# Altium PCB CAN_Test_Runner.PcbDoc (part 2 of 2)
Units mil, origin at the board's own origin, x right, y up, seen from the top; angles counter-clockwise.
Board outline 3937.01 x 2598.43 mil, 4 copper layers (Top Layer, Mid-Layer 1, Mid-Layer 2, Bottom Layer); 131 components, 89 nets, 516 pads, 356 vias.
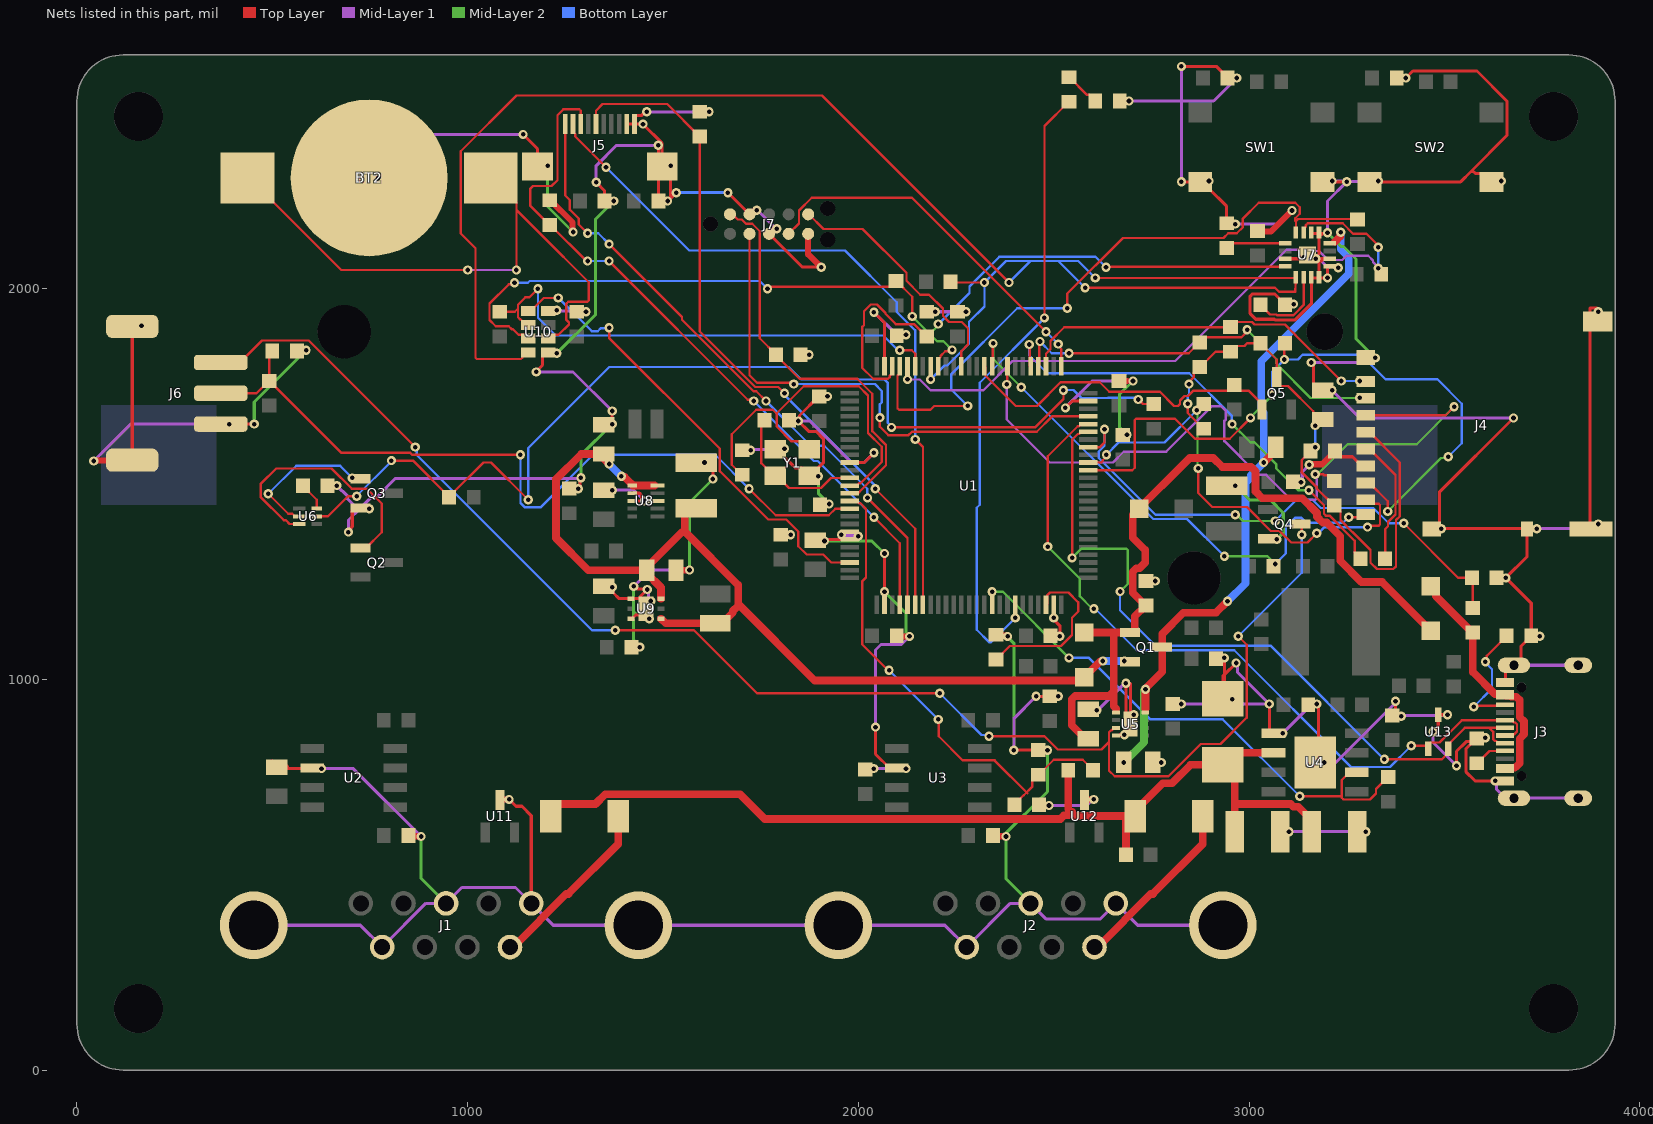
[diagram p4: the nets of this part, all layers, seen from the top]

## Via types
v1: diameter 23.62, hole 11.81, Top Layer to Bottom Layer, 356 vias

## Nets (pads, with @x,y where several pads share a name; then routed paths per layer and width w, separated by ;. In a path a pad name is that pad's centre, name@x,y a point inside that pad or via, vN(x,y) a via of type N, cw(c..) or ccw(c..) an arc to the next point about the centre after c; other vN are vias at no path point) (continued)
GND: BT2.2 C1.2 C2.2 C6.2 C7.2 C8.2 C9.2 C10.2 C12.2 C13.2 C14.2 C15.2 C16.2 C17.2 C18.2 C19.2 C20.2 C21.2 C22.2 C23.2 C24.2 C25.2 C26.2 C27.2 C28.2 C29.2 C30.2 C31.2 C32.2 C33.2 C34.2 C35.2 C36.2 C37.2 C38.2 C39.2 C40.2 C41.2 C42.2 C43.2 D3.2 D7.2 J1.3 J1.5 J1.6 J1.MH J2.3 J2.5 J2.6 J2.MH J3.A1 J3.A12 J3.SH J4.6 J4.10 J4.SH J5.9 J5.10 J5.MP J6.3 J6.MP J7.3 J7.5 J7.9 Q3.2 Q4.2 R2.2 R3.2 R5.2 R9.2 R10.2 R11.2 R14.2 R15.2 R18.2 R19.2 R21.2 R24.2 R25.2 R26.2 R27.2 R29.2 R40.2 R41.2 SW1.2 SW1.4 SW2.2 SW2.4 U1.10 U1.19 U1.20 U1.27 U1.49 U1.74 U1.99 U2.2 U3.2 U4.1 U4.9 U5.4 U5.9 U7.3 U7.7 U7.8 U7.9 U7.10 U7.13 U7.14 U7.17 U8.2 U8.3 U8.8 U9.1 U9.3 U9.7 U10.5 U10.8 U11.3 U12.3 U13.3 Y1.2 Y1.4 | length 25816.9
  Top Layer w7.87: J6.MP@104,1561.02 116.97,1561.02 141.73,1585.79 141.73,1881.89 v1(165.35,1905.51) ; v1(389.76,1653.54) v1(454,1653.54) ; C18.2@500,791.34 508.39,782.95 527.05,782.95 538,772 601.33,772 U2.2@602.36,773.03 ; v1(695,1377) 695,1381.26 704.72,1390.99 704.72,1431.1 712.6,1438.98 Q3.2@726.38,1438.98 ; C35.2@848.43,600.39 850.82,598 v1(881,598) ; v1(1106.3,692.91) 1123.9,675.31 1139.11,675.31 1162.99,651.43 J1.5@1162.99,426.77 ; v1(1142,2395) 1179.13,2357.87 J5.MP@1179.13,2312.99 ; v1(1176,1787) 1176,1788.55 1191.93,1804.48 1191.93,1827.76 1198.82,1834.65 1201,1834.65 1202.97,1836.61 U10.5@1206.69,1836.61 ; v1@1280,1488.19 1280,1488.99 1287.48,1496.47 1287.48,1513.48 v1(1290,1516) ; v1(1329,2272.39) 1350.39,2251 C36.2@1350.39,2224.41 ; C16.2@1348.43,1651.57 1355.43,1658.57 1370,1658.57 v1(1370,1687) ; v1(1370.08,1236.22) 1372.05,1234.25 1372.05,1222.44 1387.8,1206.69 U9.1@1418.31,1206.69 1436.69,1206.69 1439.8,1209.8 U9.7@1442,1212 ; J5.9@1407.48,2421.26 J5.10@1427.17,2421.26 ; U9.3@1418.31,1155.51 1420.28,1157.48 1423.23,1157.48 1431.03,1165.29 1440.94,1165.29 1445.3,1169.64 U9.7@1445.3,1169.7 ; U8.3@1421.26,1456.69 1444.88,1456.69 1444.88,1471.77 1440.27,1476.38 U8.2@1421.26,1476.38 ; v1(1425,1238) 1429.26,1238 1435.52,1231.74 1458.26,1231.74 v1(1460,1230) U9.7@1442,1212 ; v1(1452.76,1456.69) U8.8@1478.35,1456.69 ; v1(1458.66,2452.76) 1454.4,2452.76 1444.56,2442.91 1429.13,2442.91 1427.17,2440.95 J5.10@1427.17,2421.26 ; v1(1465,1155) U9.7@1456.69,1163.31 ; C38.2@1488.19,2224.41 v1(1488.19,2367) ; J5.MP@1498.03,2312.99 1498.03,2372.05 v1(1448.82,2421.26) J5.10@1427.17,2421.26 ; v1(1511.81,2224.41) 1519.69,2232.28 v1(1519.69,2314.96) ; v1@1520.13,2231.84 v1(1534,2245.7) ; v1@1559.06,1279.53 1567.53,1279.53 v1(1568,1280) ; C10.2@1585.63,1555.12 1607.2,1555.12 1627.87,1534.45 v1(1627.87,1512.87) ; v1(1666.31,2245.7) J7.9@1721.65,2190.35 ; J7.3@1771.65,2140.35 1857.01,2055 v1(1905,2055) ; Y1.4@1797,1588.58 1797,1582.92 1838.58,1541.34 1854.33,1541.34 Y1.2@1874.02,1521.65 ; v1(1846.46,1661.42) 1873.11,1634.76 1891.65,1634.76 1910.51,1615.91 1910.51,1554.21 1897.64,1541.34 Y1.2@1897.64,1521.65 ; v1@1846.46,1663.39 1849.49,1666.42 1849.49,1675.28 1898.62,1724.41 C28.2@1899.61,1724.41 ; v1(1913.39,1354.33) 1913.39,1358.27 U1.20@1978.35,1358.27 1980.31,1360.24 1995.62,1360.24 1995.62,1361.76 v1(2000,1366.14) ; v1(1956.69,1370.08) 1961.07,1374.46 1961.07,1375.98 1976.38,1375.98 U1.19@1978.35,1377.95 ; U1.10@1978.35,1555.12 2015.12,1555.12 v1(2040,1580) ; v1(2040,1940) 2066.93,1913.07 U1.99@2066.93,1801.18 ; v1(2044,878) 2044,808.76 2079.73,773.03 U3.2@2098.43,773.03 ; U1.27@2066.93,1190.94 v1(2066.93,1322.13) ; v1@2122.05,1110 v1(2131,1110) ; v1@2370.08,598 v1(2378,598) ; v1(2398,818.9) R9.2@2460.63,818.9 ; v1(2455,956.69) R10.2@2490.16,956.69 ; U1.49@2500,1190.94 2500,1153.22 2515.75,1137.47 v1(2515.75,1110.24) ; v1(2530.02,1694.98) 2547.63,1712.6 U1.74@2588.58,1712.6 ; U5.4@2659.45,856.3 2670,856.3 2676.53,862.84 2678.39,862.84 U5.9@2681.1,865.54 ; v1@2670,858.27 v1(2681.1,858.27) 2681.1,871.3 2683.07,871.3 2685,873.23 U5.9@2685,889.72 ; U5.9@2681.1,867.4 2683.07,867.4 2685,869.33 U5.9@2685,889.72 ; v1(2685,990) U5.9@2685,889.72 ; 2688.98,1763.78 v1(2703,1763.78) ; U5.9@2696.85,885.83 U5.9@2696.85,901.57 ; 2696.85,990 U5.9@2696.85,901.57 ; v1(2704.72,909.45) U5.9@2696.85,901.57 ; v1(2827,2273.62) SW1.2@2875,2273.62 ; v1(2827,2569) 2916.24,2569 2944.88,2540.35 C41.2@2944.88,2539.37 ; v1(2897.64,2275.59) 2897.64,2255.91 2942.91,2210.63 R21.2@2942.91,2167.32 ; D3.2@2933.07,950.79 2933.07,1008.07 2937.01,1012.01 ; v1(2937.01,1055.12) 2937.01,1012.01 ; v1(2956.69,948.82) 2937.01,968.5 2937.01,1012.01 ; v1(2967,1042) 2937.01,1012.01 ; v1(3052,937.01) 3052,870.28 3059.87,862.4 U4.1@3062.99,862.4 ; U7.3@3092.52,2076.77 3092.6,2076.69 3131.89,2076.69 U7.17@3137.87,2082.68 ; v1(3114.17,1960.63) 3103.84,1970.97 3081.2,1970.97 3065.87,1986.3 3008.11,1986.3 3002.87,1981.06 3002.87,1936.26 3017.24,1921.89 3064.81,1921.89 3066.58,1920.12 3118.46,1920.12 3159.45,1961.11 U7.7@3159.45,2029.53 3161.42,2027.56 3177.17,2027.56 U7.8@3179.13,2029.53 v1@3179.13,2076.77 ; v1(3159,1811) 3159,1806.74 3165.35,1800.38 3165.35,1755.91 3181.1,1740.16 C32.2@3188.98,1740.16 ; U7.14@3159.45,2143.7 3161.42,2141.73 3177.17,2141.73 U7.13@3179.13,2143.7 ; v1@3174.17,2083.89 3179.13,2088.85 3179.13,2132.13 3188.73,2141.73 ; v1@3180,935.04 3178.23,933.27 3178.23,802.09 v1(3192.91,787.4) ; U7.8@3181.1,2027.56 v1(3200.79,2027.56) 3200.79,2055.12 3202.76,2057.09 U7.9@3206.69,2057.09 3208.29,2055.49 3226.75,2055.49 v1(3228.35,2053.9) ; U7.13@3181.1,2141.73 3188.73,2141.73 ; 3183.07,2076.77 U7.10@3206.69,2076.77 3204.72,2074.8 3188.98,2074.8 3185.04,2070.87 ; v1(3201,2143) 3199.73,2141.73 3188.73,2141.73 ; SW1.4@3212.6,2273.62 v1(3250,2273.62) ; C33.2@3220.47,1583.66 3234.25,1569.88 3264.76,1569.88 3288.39,1546.26 J4.6@3298.23,1546.26 ; SW2.2@3330.71,2273.62 3541.62,2273.62 3568,2300 ; R5.2@3366.14,907.48 3375,916.34 v1(3375,944) ; v1(3401.57,2539.37) 3419.37,2557.17 3583.43,2557.17 3660.51,2480.08 3660.51,2392.51 3568,2300 ; J4.SH@3468.5,1385.83 3472.44,1385.83 3487.21,1400.59 3487.21,1479.21 v1(3677,1669) ; v1(3471,866) 3484.25,879.25 U13.3@3484.25,909.45 v1(3507.87,909.45) ; v1(3492.13,1385.83) 3710.63,1385.83 J4.10@3711.61,1384.84 ; v1(3531,779) 3531,815.94 3555.86,840.8 3575.05,840.8 R26.2@3582.68,848.43 ; R26.2@3578.43,848.43 3578.43,845.16 3555.04,821.77 3555.04,764.02 3578.9,740.16 v1(3629.92,740.16) ; v1(3645.67,2275.59) 3625.98,2295.28 3579.25,2295.28 3574.52,2300 3568,2300 ; J3.A12@3666,1000 3656.42,1000 3656.42,1021.67 3670.97,1036.22 3681.12,1036.22 3695.67,1050.77 3695.67,1084.45 3721.46,1110.24 R27.2@3724.41,1110.24 ; J4.10@3711.61,1381 3711.61,1313.98 v1(3657.48,1259.84) 3722.44,1194.88 R27.2@3722.44,1112.2 ; J4.SH@3875,1384.84 3872.95,1386.89 3872.95,1950.87 3890.69,1950.87 3890.69,1943.96 v1(3893.7,1940.94) ; U9.7@1442,1212 1442,1173 U9.7@1445.3,1169.7 ; U9.7@1445.3,1169.7 1447.8,1172.2 U9.7@1456.69,1181.1 U9.7@1456.69,1163.31 ; U9.7@1445.3,1169.7 1450.3,1169.7 U9.7@1456.69,1163.31 ; U5.9@2685,889.72 U5.9@2696.85,901.57
  Top Layer w15.75: v1(43.31,1559.06) 44.29,1560.04 103.02,1560.04 104,1559.06 105.97,1561.02 J6.MP@141.73,1561.02 ; J6.MP@141.73,1903.54 143.7,1905.51 v1(165.35,1905.51) ; J6.3@368.11,1653.54 v1(389.76,1653.54) ; C18.2@511.81,775.59 C18.2@535.43,775.59 ; C43.2@562.99,1840.55 563.98,1841.54 585.63,1841.54 v1(586.61,1842.52) ; U2.2@602.36,773.03 624.61,773.03 v1(625.98,771.65) ; R18.2@641.73,1496.06 v1(665.35,1496.06) ; Q3.2@726.38,1438.98 727.36,1437.99 747.05,1437.99 v1(748.03,1437.01) ; BT2.2@748.03,2283.46 v1(771.65,2283.46) ; C35.2@848.43,600.39 850.39,598.43 v1@874.02,598.43 ; U11.3@1082.68,690.94 1084.65,692.91 v1(1106.3,692.91) ; J5.MP@1179.13,2312.99 1181.1,2314.96 v1(1204.72,2314.96) ; U10.5@1206.69,1836.61 1207.68,1835.63 1227.36,1835.63 v1(1228.35,1834.65) ; U10.8@1206.69,1942.91 1207.68,1943.9 1227.36,1943.9 v1(1228.35,1944.88) ; R40.2@1210.63,2226.38 1211.61,2226.38 1268.49,2169.5 1268.49,2146.51 v1(1270,2145) ; R24.2@1259.84,1488.19 v1(1283.46,1488.19) ; C40.2@1279.53,1940.94 v1(1303.15,1940.94) ; C17.2@1348.43,1238.19 1368.11,1238.19 v1(1370.08,1236.22) ; C14.2@1348.43,1484.25 v1(1370.08,1484.25) ; C16.2@1348.43,1651.57 1350.4,1653.54 v1(1370.08,1653.54) ; C36.2@1350.39,2224.41 v1(1374.02,2224.41) ; C39.2@1419.29,1082.68 v1(1440.94,1082.68) ; U9.7@1456.69,1181.1 1456.69,1188.98 v1(1468.5,1200.79) ; C38.2@1488.19,2224.41 v1(1511.81,2224.41) ; J5.MP@1498.03,2312.99 1500,2314.96 v1(1519.69,2314.96) ; C13.2@1533.46,1279.53 v1@1559.06,1279.53 ; C10.2@1584.65,1554.13 1585.63,1555.12 v1(1606.3,1555.12) ; R41.2@1594.49,2452.76 v1(1618.11,2452.76) ; C31.2@1702.76,1586.61 v1(1724.41,1586.61) ; J7.9@1721.65,2190.35 1725.78,2190.35 1734.7,2199.28 1738.65,2199.28 v1(1740.16,2200.79) ; J7.3@1771.65,2140.35 1775.78,2140.35 1787.46,2152.04 1789.83,2152.04 v1(1791.34,2153.54) ; Y1.4@1787.4,1588.58 1789.37,1590.55 v1(1811.02,1590.55) ; C27.2@1801.18,1370.08 v1(1826.77,1370.08) ; C30.2@1822.83,1663.39 1823.82,1662.4 1845.47,1662.4 v1(1846.46,1661.42) ; C29.2@1852.36,1830.71 v1(1874.02,1830.71) ; J7.5@1871.65,2140.35 1871.65,2088.35 v1(1905,2055) ; Y1.2@1874.02,1521.65 1875.98,1519.69 v1(1897.64,1519.69) ; C26.2@1889.76,1356.3 1890.75,1355.32 1912.4,1355.32 v1(1913.39,1354.33) ; C28.2@1899.61,1724.41 v1(1921.26,1724.41) ; C15.2@1901.57,1446.85 1902.56,1447.83 1924.21,1447.83 v1(1925.2,1448.82) ; C34.2@2017.72,769.69 2018.7,770.67 2038.39,770.67 v1(2039.37,771.65) ; U3.2@2098.43,773.03 2120.67,773.03 v1(2122.05,771.65) ; C21.2@2098.43,1112.2 2100.39,1110.24 v1@2122.05,1110.24 ; C24.2@2098.43,1879.92 2099.41,1880.91 2121.06,1880.91 v1(2122.05,1881.89) ; C20.2@2175.2,1940.94 v1(2196.85,1940.94) ; R25.2@2253.94,1940.94 v1(2275.59,1940.94) ; C37.2@2344.49,600.39 2346.46,598.43 v1@2370.08,598.43 ; C19.2@2352.36,1114.17 2354.99,1111.55 2380.58,1111.55 v1(2382.09,1110.04) ; R9.2@2460.63,818.9 v1(2484.25,818.9) ; C7.2@2462.6,679.13 2463.58,678.15 2487.21,678.15 v1(2488.19,677.17) ; R10.2@2490.16,956.69 v1(2511.81,956.69) ; C22.2@2492.13,1112.2 2493.11,1111.22 2514.76,1111.22 v1(2515.75,1110.24) ; U12.3@2578.74,690.94 2580.71,692.91 v1(2602.36,692.91) ; C8.2@2588.58,923.23 2608.27,923.23 v1(2610.24,921.26) ; C23.2@2667.32,1763.78 2688.98,1763.78 ; D7.2@2669.29,2480.32 v1(2692.91,2480.32) ; C25.2@2677.17,1625.98 v1(2687.7,1625.98) ; U5.9@2696.85,885.83 2696.85,893.7 2704.72,901.57 v1(2704.72,909.45) ; R15.2@2736.22,1251.97 v1(2759.84,1251.97) ; C9.2@2753.94,787.4 v1(2775.59,787.4) ; R2.2@2805.12,937.01 v1(2826.77,937.01) ; SW1.2@2875,2273.62 2876.97,2275.59 v1(2897.64,2275.59) ; R11.2@2915.35,1053.15 2916.34,1054.13 2936.02,1054.13 v1(2937.01,1055.12) ; D3.2@2933.07,950.79 2954.72,950.79 v1(2956.69,948.82) ; C6.2@2942.91,1495.08 2943.9,1496.06 v1(2964.57,1496.06) ; R21.2@2942.91,2167.32 2943.9,2166.34 2963.58,2166.34 v1(2964.57,2165.35) ; C41.2@2944.88,2539.37 v1(2968.5,2539.37) ; C12.2@3021.65,2147.64 3022.64,2146.65 3056.65,2146.65 v1(3110,2200) ; Q4.2@3049.21,1360.24 3050.2,1359.25 3069.88,1359.25 v1(3070.87,1358.27) ; U4.1@3063.19,862.2 v1(3086.61,862.2) ; C1.2@3079.72,610.24 v1(3102.36,610.24) ; R19.2@3092.52,1958.66 3093.5,1959.65 3113.19,1959.65 v1(3114.17,1960.63) ; R14.2@3112.2,1505.91 3112.85,1505.26 3132.54,1505.26 v1(3133.19,1504.61) ; R3.2@3151.57,935.04 3152.56,936.02 3172.24,936.02 v1(3173.23,937.01) ; v1(3154.42,1549.13) 3155.92,1550.64 3187.45,1550.64 3220.47,1583.66 C33.2@3220.47,1584.65 ; U4.9@3169.29,787.4 v1(3192.91,787.4) ; SW1.4@3187.99,2273.62 3189.96,2275.59 v1(3212.6,2275.59) ; C32.2@3188.98,1740.16 v1(3212.6,1740.16) ; C2.2@3276.57,610.24 v1(3299.21,610.24) ; J4.SH@3298.23,1823.82 3298.72,1823.33 3322.34,1823.33 v1(3322.83,1822.83) ; SW2.2@3308.07,2273.62 3310.04,2275.59 v1(3330.71,2275.59) ; R5.2@3366.14,907.48 3367.13,906.5 3388.78,906.5 v1(3389.76,905.51) ; C42.2@3377.95,2539.37 v1(3401.57,2539.37) ; J4.SH@3467.52,1384.84 3468.5,1385.83 v1(3492.13,1385.83) ; R26.2@3582.68,848.43 3583.66,849.41 3603.98,849.41 v1(3604.96,850.39) ; SW2.4@3621.06,2273.62 3623.03,2275.59 v1(3645.67,2275.59) ; v1(3629.92,740.16) J3.A1@3655.32,740.16 ; R29.2@3633.86,1259.84 v1(3657.48,1259.84) ; J4.10@3711.61,1384.84 3712.11,1385.33 3735.73,1385.33 v1(3736.22,1385.83) ; R27.2@3722.44,1112.2 3724.41,1110.24 v1(3744.09,1110.24) ; J4.SH@3875,1384.84 3880.9,1384.84 v1(3893.7,1397.64) ; J4.SH@3892.72,1916.34 3893.7,1917.32 v1(3893.7,1940.94)
  Top Layer w19.68: U7.17@3149.61,2086.61 3158.85,2077.37 3170.4,2077.37 v1(3171.16,2076.61)
  Mid-Layer 1 w7.87: v1(43.31,1559.06) 137.8,1653.54 v1(389.76,1653.54) ; J1.MH@452.76,370.87 725.39,370.87 J1.6@781.3,314.96 893.11,426.77 J1.3@944.88,426.77 985.32,467.21 1122.56,467.21 1218.9,370.87 2221.46,370.87 J2.6@2277.36,314.96 2389.17,426.77 J2.3@2440.94,426.77 2481.38,386.34 2618.62,386.34 J2.5@2659.06,426.77 2714.96,370.87 J2.MH@2933.07,370.87 ; v1@625.81,771.83 625.98,772 626.33,771.65 707.35,771.65 v1(881,598) ; v1(665.35,1496.06) 692.93,1468.49 692.93,1461.57 717.49,1437.01 724.01,1437.01 ; v1(695,1377) 695,1408 724.01,1437.01 ; v1(748.03,1437.01) 724.01,1437.01 ; v1(771.65,2283.46) 883.19,2395 v1(1142,2395) ; v1(1176,1787) 1270,1787 v1(1370,1687) ; v1(1228.35,1944.88) 1230.32,1942.91 1301.18,1942.91 v1(1303.15,1940.94) ; v1(1290,1516) 1288.69,1514.69 815.68,1514.69 768.44,1467.44 754.44,1467.44 724.01,1437.01 ; v1(1329,2272.39) 1329,2315.04 1380.96,2367 v1(1488.19,2367) ; v1(1370.08,1484.25) 1425.2,1484.25 v1(1452.76,1456.69) ; v1(1425,1238) 1466.53,1279.53 v1@1559.06,1279.53 ; v1(1458.66,2452.76) v1(1618.11,2452.76) ; v1(1460,1230) 1463.01,1226.99 1463.01,1210.54 1468.5,1205.05 v1(1468.5,1200.79) ; v1(1724.41,1586.61) 1726.38,1588.58 1809.06,1588.58 v1(1811.02,1590.55) ; v1(1740.16,2200.79) 1742.13,2200.79 1789.37,2153.54 v1(1791.34,2153.54) ; v1(1846.46,1661.42) 1875.98,1661.42 1982.28,1555.12 2015.12,1555.12 v1(2040,1580) ; v1(1956.69,1370.08) 1958.66,1368.11 1998.03,1368.11 v1(2000,1366.14) ; v1(2039.37,771.65) v1(2122.05,771.65) ; v1(2040,1940) 2098.11,1881.89 v1(2122.05,1881.89) ; v1(2044,878) 2044,1075.34 2058.15,1089.49 2110.49,1089.49 v1(2131,1110) ; v1(2196.85,1940.94) v1(2275.59,1940.94) ; v1(2398,818.9) 2398,899.69 v1(2455,956.69) ; v1(2488.19,677.17) 2584.7,677.17 2600.45,692.91 v1(2602.36,692.91) ; v1(2530.02,1694.98) 2598.82,1763.78 2688.98,1763.78 ; v1(2610.24,921.26) 2613.25,921.26 2681.99,990 v1(2685,990) ; v1(2692.91,2480.32) 2827,2480.32 ; v1(2826.77,937.01) v1(3052,937.01) 2970.01,1018.99 2970.01,1038.99 v1(2967,1042) ; v1(2827,2273.62) 2827,2480.32 ; v1(2827,2569) 2827,2480.32 ; v1(2964.57,2165.35) 3075.35,2165.35 v1(3110,2200) ; v1(2968.5,2539.37) 2909.45,2480.32 2827,2480.32 ; v1(3086.61,862.2) 3158.4,933.99 3170.21,933.99 v1(3173.23,937.01) ; v1(3102.36,610.24) v1(3299.21,610.24) ; v1(3133.19,1504.61) 3136.2,1507.62 3136.2,1530.92 v1(3154.42,1549.13) ; v1(3159,1811) 3306.74,1811 3318.57,1822.83 v1(3322.83,1822.83) ; 3185.04,2070.87 3200.79,2055.12 3227.12,2055.12 v1(3228.35,2053.9) ; v1(3192.91,787.4) 3222.26,787.4 3375,940.15 v1(3375,944) ; v1(3201,2143) 3201,2224.62 v1(3250,2273.62) ; v1(3212.6,1740.16) 3283.76,1669 v1(3677,1669) ; v1(3212.6,2275.59) 3212.83,2275.36 3249.77,2275.36 3250,2275.59 3250.98,2274.61 3329.72,2274.61 v1(3330.71,2275.59) ; v1(3389.76,905.51) 3391.73,907.48 3505.91,907.48 v1(3507.87,909.45) ; v1(3471,866) 3471,839 v1(3531,779) ; v1(3629.92,740.16) 3632.94,737.14 3632.94,719.43 3656.3,696.06 J3.SH@3842.52,696.06 ; J3.SH@3677.95,1036.22 J3.SH@3842.52,1036.22 ; v1(3736.22,1385.83) 3877.63,1385.83 3889.44,1397.64 v1(3893.7,1397.64)
  Mid-Layer 2 w7.87: v1(454,1653.54) 454,1709.91 v1(586.61,1842.52) ; v1@874.02,598.43 881,591.44 881,490.65 J1.3@944.88,426.77 ; v1(1204.72,2314.96) 1204.72,2210.28 v1(1270,2145) ; v1(1228.35,1834.65) 1327.83,1934.13 1327.83,2178.23 v1(1374.02,2224.41) ; v1(1283.46,1488.19) 1286.48,1491.2 1286.48,1508.22 1286.99,1508.73 1286.99,1512.48 1283.46,1516 1290,1522.54 1290,1573.47 v1(1370.08,1653.54) ; v1(1425,1238) 1425,1173.42 ; v1(1440.94,1082.68) 1440.94,1084.2 1425,1100.14 1425,1173.42 ; v1(1465,1155) 1460.74,1155 1446.93,1168.81 1429.61,1168.81 1425,1173.42 ; v1(1568,1280) 1568,1453 v1(1627.87,1512.87) ; v1(1897.64,1519.69) 1897.64,1476.38 v1(1925.2,1448.82) ; v1(1913.39,1354.33) 2034.73,1354.33 v1(2066.93,1322.13) ; v1(2066.93,1224.41) 2122.05,1169.29 v1@2122.05,1110.24 ; v1@2370.08,598.43 2484.25,712.6 v1(2484.25,818.9) ; v1(2378,598) 2378,489.72 J2.3@2440.94,426.77 ; v1(2382.09,1110.04) 2382.09,1108.46 2398,1092.55 v1(2398,818.9) ; v1(2687.7,1625.98) 2668.23,1645.46 2668.23,1729.01 v1(2703,1763.78) ; v1(2964.57,1496.06) 3001.15,1459.48 3054.11,1459.48 3087.68,1425.92 3087.68,1375.08 v1(3070.87,1358.27) ; v1(3201,2143) 3236.06,2107.94 3241.83,2107.94 3273.88,2075.89 3273.88,1871.79 v1(3322.83,1822.83)
  Bottom Layer w7.87: v1(1534,2245.7) v1(1666.31,2245.7)
  other v1: 2500,1157.48 3140,2080
I2C_SCL: R43.2 U1.92 U7.4 U10.3 | length 2568.5
  Top Layer w5.91: v1(1120,2015) 1116.61,2011.61 1105.68,2011.61 1056.02,1961.95 1056.02,1919.93 1072.34,1903.62 1105.56,1903.62 1112.61,1896.57 1115.5,1896.57 1130.18,1881.89 1145.67,1881.89 U10.3@1155.51,1872.05 ; v1(1767.72,2000) 1772.51,2000 1777.43,2004.92 2081.69,2004.92 R43.2@2096.46,2019.69 2097.44,2019.69 2137.87,1979.25 2137.87,1929.21 v1(2137.8,1929.13) ; U1.92@2204.72,1801.18 2204.72,1818.9 2210.55,1824.73 2210.55,1828.1 2222.49,1840.03 2236.61,1840.03 v1(2240,1843.42) ; v1(2633.86,2055.12) 2634.84,2056.1 3091.54,2056.1 U7.4@3092.52,2057.09
  Mid-Layer 2 w5.91: v1(2137.8,1929.13) 2183.07,1883.86 ; v1(2204.7,1909.68) 2204.7,1905.49 2183.07,1883.86 ; v1(2240,1843.42) 2218.09,1865.34 2201.59,1865.34 2183.07,1883.86
  Bottom Layer w5.91: v1(1120,2015) 1154.11,2015 1158.87,2019.76 1747.95,2019.76 v1(1767.72,2000) ; v1(2204.7,1909.68) 2204.95,1909.68 2284.58,1989.3 2284.58,2005.44 2361.04,2081.91 2607.07,2081.91 v1(2633.86,2055.12)
I2C_SDA: R44.2 U1.93 U7.5 U10.4 | length 4411.4
  Top Layer w5.91: U10.4@1155.51,1836.61 1149.61,1836.61 1139.76,1826.77 1139.76,1823.46 1136.3,1820 1023.46,1820 1020,1823.46 1020,2103.66 982.21,2141.45 982.21,2351.72 1124.82,2494.33 1907.24,2494.33 v1(2385.83,2015.75) ; R44.2@2236.22,2017.72 2238.19,2015.75 v1(2322.83,2015.75) ; v1(2580.5,2002.5) 3066.48,2002.5 3076.85,1992.13 3118.11,1992.13 U7.5@3120.08,2029.53 3118.11,2027.56 v1(2606.3,2027.56)
  Bottom Layer w5.91: v1(2185.04,1767.93) 2220.39,1803.28 2227.8,1803.28 2283.39,1858.86 2283.39,1915.18 2322.83,1954.63 v1(2322.83,2015.75) 2377.95,2070.87 2562.99,2070.87 v1(2606.3,2027.56) ; v1(2385.83,2015.75) 2441.08,2071 2512,2071 v1(2580.5,2002.5)
LCD_CS: J5.3 R40.1 U1.29 | length 1851.2
  Top Layer w5.91: J5.3@1289.37,2421.26 1289.37,2455.71 1285.91,2459.17 1245.17,2459.17 1229.98,2443.99 1229.98,2277.79 1214.8,2262.61 1167.61,2262.61 1160,2255 1160,2213.03 1209.65,2163.39 1211.61,2163.39 1304.13,2070.87 v1(1307.09,2070.87) ; v1(1362.2,2070.87) 1717.08,1715.99 1728.89,1715.99 v1(1732.28,1712.6) ; v1(2040,1415) 2106.3,1348.7 U1.29@2106.3,1190.94
  Bottom Layer w5.91: v1(1307.09,2070.87) v1(1362.2,2070.87) ; v1(1732.28,1712.6) 1885.83,1559.05 1895.94,1559.05 v1(2040,1415)
LCD_DISP: J5.5 R41.1 U1.31 | length 1803.2
  Top Layer w5.91: J5.5@1328.74,2421.26 1328.74,2455.71 1345.55,2472.52 1510.75,2472.52 1593.5,2389.76 R41.1@1594.49,2389.76 1594.21,2389.49 1594.21,1890.36 1736.19,1748.39 1794.92,1748.39 v1(1811.02,1732.28) ; v1(2043.31,1488.19) 2145.67,1385.83 U1.31@2145.67,1190.94
  Bottom Layer w5.91: v1(1811.02,1732.28) 1811.02,1727.96 2039.92,1499.06 2039.92,1491.58 v1(2043.31,1488.19)
LCD_SCK: J5.1 U1.30 | length 1633.8
  Top Layer w5.91: J5.1@1250,2421.26 1250,2238.58 1261.73,2226.85 1261.73,2202.42 1284.32,2179.83 1284.32,2164.5 v1(1307.09,2141.73) ; v1(1362.2,2114.17) 1548.63,1927.75 1548.63,1920.52 1731.67,1737.48 1738.89,1737.48 v1(1763.78,1712.6) ; v1(2023.62,1464.57) 2125.98,1362.2 U1.30@2125.98,1190.94
  Bottom Layer w5.91: v1(1307.09,2141.73) 1334.65,2141.73 v1(1362.2,2114.17) ; v1(1763.78,1712.6) 1878.07,1598.31 1912.59,1598.31 2023.03,1487.87 2023.03,1465.16 v1(2023.62,1464.57)
LCD_SI: J5.2 U1.32 | length 1834.7
  Top Layer w5.91: J5.2@1269.69,2421.26 1269.69,2401.57 1275.51,2395.75 1275.51,2389.84 v1(1354.33,2311.02) ; v1(2145.67,1614.33) 2165.35,1594.65 U1.32@2165.35,1190.94
  Bottom Layer w5.91: v1(1354.33,2311.02) 1567.44,2097.91 1965.84,2097.91 2098.35,1965.41 2098.35,1940.63 2145.67,1893.31 v1(2145.67,1614.33)
LED_A: D7.1 R47.2 | length 92.8
  Top Layer w5.91: R47.2@2539.37,2541.34 2540.35,2541.34 2585.63,2496.06 2591.54,2496.06 2606.3,2481.3 D7.1@2606.3,2480.32
LED_STAT: R47.1 U1.44 | length 1620.6
  Top Layer w5.91: v1(2401.57,1157.48) U1.44@2401.57,1190.94 ; v1(2476.38,1925.2) 2476.38,2416.34 2538.39,2478.35 R47.1@2539.37,2478.35
  Bottom Layer w5.91: v1(2401.57,1157.48) 2339.49,1095.4 2334.6,1095.4 2303.07,1126.93 2303.07,1439.41 2310.67,1447.01 2310.67,1759.49 v1(2476.38,1925.2)
NRST: C29.1 J7.10 U1.14 | length 1036
  Top Layer w5.91: J7.10@1671.65,2190.35 1678.44,2190.35 1691.55,2177.24 1701.61,2177.24 1712.47,2166.38 1728.78,2166.38 1747.95,2147.21 1747.95,1873.11 1789.37,1831.69 1789.37,1829.72 1849.4,1769.69 1997.13,1769.69 2035.47,1731.35 2035.47,1635.46 2070.91,1600.03 2070.91,1547.85 2002.39,1479.33 1981.3,1479.33 U1.14@1978.35,1476.38
NTC_CHG: J6.1 Q4.3 U5.3 | length 3862.2
  Top Layer w5.91: J6.1@368.11,1811.02 417.32,1811.02 473.5,1867.21 593.42,1867.21 v1(866.14,1594.57) v1(866.14,1594.57) ; v1(1377.95,1125.98) 1378.03,1125.9 1579.38,1125.9 1740.72,964.57 v1(2208.66,964.57) ; v1(2334.65,854.33) 2476.77,854.33 2510.31,820.79 2622.44,820.79 2641.65,840 ; U5.3@2659.45,875.98 2654.53,875.98 2647.72,869.17 2646.31,869.17 2641.65,864.52 2641.65,840 ; v1(2972.44,1110.24) 2994.17,1088.5 2994.17,902.22 2926.68,834.72 2876.63,834.72 2793.79,751.89 2656.15,751.89 2641.65,766.39 2641.65,840 ; Q4.3@3131.89,1397.64 3135,1394.53 v1(3135,1370)
  Bottom Layer w5.91: v1(866.14,1594.57) 869.53,1591.18 869.53,1574.96 1318.51,1125.98 v1(1377.95,1125.98) ; v1(2208.66,964.57) 2315.51,857.72 2331.26,857.72 v1(2334.65,854.33) ; v1(2972.44,1110.24) 3135,1272.8 v1(3135,1370)
NTC_MCU: C43.1 J6.2 R48.2 U1.16 | length 2036.5
  Top Layer w5.91: J6.2@368.11,1732.28 459.65,1732.28 491.14,1763.78 R48.2@492.13,1763.78 ; C43.1@500,1840.55 492.13,1832.68 R48.2@492.13,1763.78 ; v1(1135.24,1575) 1135.04,1574.8 857.96,1574.8 853,1579.76 677.13,1579.76 493.11,1763.78 R48.2@492.13,1763.78 ; v1(1720.47,1488.19) 1788.47,1420.2 1924.52,1420.2 1941.34,1437.01 U1.16@1978.35,1437.01
  Bottom Layer w5.91: v1(1135.24,1575) 1135.24,1451.81 1146.81,1440.24 1186.29,1440.24 1320.93,1574.88 1633.78,1574.88 v1(1720.47,1488.19)
OSC_IN: C30.1 U1.12 Y1.1 | length 376.7
  Top Layer w5.91: C30.1@1759.84,1663.39 1751.89,1655.43 1751.89,1553.23 1783.46,1521.65 1791.34,1521.65 1822.91,1490.08 1904.87,1490.08 1930.46,1515.67 U1.12@1978.35,1515.75 U1.12@1978.35,1515.75
OSC_OUT: C31.1 U1.13 Y1.3 | length 964.1
  Top Layer w5.91: C31.1@1702.76,1523.62 1701.77,1523.62 1676.1,1549.29 1676.1,1627.31 1738.83,1690.04 1780.85,1690.04 1789.79,1681.1 1791.34,1681.1 ; Y1.3@1874.02,1588.58 1853.35,1609.25 1829.3,1609.25 1791.34,1647.22 1791.34,1681.1 ; U1.13@1978.35,1496.06 1996.06,1496.06 2001.89,1501.89 2005.26,1501.89 2060,1556.63 2060,1595.51 2024.57,1630.94 2024.57,1726.84 2001.33,1750.08 1860.32,1750.08 1791.34,1681.1
PAC_ADDR: R19.1 U7.6 | length 204
  Top Layer w5.91: R19.1@3029.53,1958.66 3029.53,1957.68 3053.43,1933.78 3069.74,1933.78 3071.51,1932.01 3113.53,1932.01 3118.19,1936.67 3139.76,1958.24 U7.6@3139.76,2029.53
PAC_ALERT: R22.2 U1.96 U7.15 | length 1706.3
  Top Layer w5.91: U7.15@3139.76,2143.7 3139.76,2153.54 3145.59,2159.37 3145.59,2162.74 3150.25,2167.4 3239.66,2167.4 3266.24,2140.83 3300.51,2140.83 3330.71,2110.63 v1(3330.71,2106.3) ; v1(3330.71,2052.28) 3338.58,2044.41 R22.2@3338.58,2037.4
  Mid-Layer 1 w5.91: v1(2125.91,1767.82) 2157.2,1767.82 2184.94,1740.08 2320.08,1740.08 2394.88,1814.88 2811.34,1814.88 3096.22,2099.76 3148.19,2099.76 3151.57,2096.38 3179.34,2096.38 3202.06,2073.66 3238.88,2073.66 3249.63,2084.41 3305.35,2084.41 3317.39,2072.37 3317.39,2068.2 3330.71,2054.88 v1(3330.71,2052.28)
  Bottom Layer w5.91: v1(3330.71,2052.28) v1(3330.71,2106.3)
PAC_PWRDN: R20.2 U1.97 U7.16 | length 1736.7
  Top Layer w5.91: U1.97@2106.3,1801.18 2106.3,1783.47 2100.47,1777.64 2100.47,1693.46 2103.93,1690 2184.57,1690 2194.57,1700 v1(2280,1700) ; v1(2535,1950) 2535,1987.75 2677.25,2130 2935,2130 2946.65,2141.65 2968.81,2141.65 2984.33,2157.17 2984.33,2179.33 3024.76,2219.76 3118.19,2219.76 3129.76,2208.19 3129.76,2191.81 3118.11,2180.16 3118.11,2173.23 ; U7.16@3120.08,2143.7 3120.08,2173.23 3125.16,2178.31 3276.42,2178.31 R20.2@3277.56,2177.17
  Bottom Layer w5.91: v1(2280,1700) 2237.56,1742.44 2237.56,1780.51 2407.05,1950 v1(2535,1950)
PAC_SLOW: R21.1 U7.1 | length 154.5
  Top Layer w5.91: R21.1@2942.91,2104.33 2954.73,2116.14 U7.1@3092.52,2116.14
PROT_BAT: C11.1 R17.2 U6.5 | length 2728.8
  Top Layer w5.91: U6.5@614.17,1417.32 642.78,1417.32 693.96,1468.5 v1(716.54,1468.5) ; v1(805,1560) 860.28,1560 C11.1@952.76,1467.52 ; C11.1@952.76,1466.54 C11.1@952.76,1467.52 ; v1(1155,1460) 1059.88,1555.12 1040.35,1555.12 C11.1@952.76,1467.52 ; v1(2085,1645) 2452.09,1645 2525,1717.91 v1(2525,1740) ; v1(2716.54,1716.54) 2728.35,1704.72 R17.2@2755.91,1704.72
  Bottom Layer w5.91: v1(716.54,1468.5) 716.54,1470.02 805,1558.48 v1(805,1560) ; v1(1155,1460) 1155,1592.01 1362.7,1799.71 1821.95,1799.71 1853.86,1767.8 2066.85,1767.8 2075,1759.65 2075,1657.32 2085,1647.32 v1(2085,1645) ; v1(2525,1740) 2525.87,1740.87 2550.86,1740.87 2571.34,1720.39 2639.69,1720.39 2639.84,1720.55 2707.73,1720.55 2711.74,1716.54 v1(2716.54,1716.54)
PROT_COUT: Q3.1 U6.2 | length 382.6
  Top Layer w5.91: v1(490,1475) 540.87,1424.13 551.26,1424.13 558.07,1417.32 U6.2@568.9,1417.32 ; v1(704.72,1515.75) 724.41,1515.75 Q3.1@726.38,1513.78
  Bottom Layer w5.91: v1(490,1475) 561.77,1546.77 673.71,1546.77 v1(704.72,1515.75)
PROT_DOUT: Q2.1 U6.3 | length 667.9
  Top Layer w5.91: U6.3@568.9,1397.64 544.29,1397.64 534.29,1407.64 529.41,1407.64 470.24,1466.81 470.24,1500.24 510,1540 651.51,1540 703.24,1488.27 741.73,1488.27 780,1450 780,1376.46 740.16,1336.61 Q2.1@726.38,1336.61
PROT_VM: R18.1 U6.6 | length 73.7
  Top Layer w5.91: R18.1@578.74,1496.06 578.74,1495.08 614.17,1459.65 U6.6@614.17,1437.01
RTC_CLKOUT: U1.23 U10.1 | length 1195.1
  Top Layer w5.91: U10.1@1155.51,1942.91 1161.42,1942.91 1194.88,1976.38 v1(1232.28,1976.38) ; v1(1362.2,1899.76) 1362.2,1874.02 1645.75,1590.47 1645.75,1532.97 1769.42,1409.29 1815.51,1409.29 1846.54,1378.26 1846.54,1341.04 1867.95,1319.63 1910.12,1319.63 1930.54,1299.21 U1.23@1978.35,1299.21
  Bottom Layer w5.91: v1(1232.28,1976.38) 1232.67,1976.38 1318.15,1890.91 1333.35,1890.91 1341.53,1899.09 1361.53,1899.09 v1(1362.2,1899.76)
RTC_INT: R42.2 U1.95 U10.2 | length 1294.9
  Top Layer w5.91: R42.2@1082.68,1940.94 1120.94,1940.94 1128.86,1948.86 ; U10.2@1155.51,1907.48 1149.61,1907.48 1134.92,1922.17 1133.52,1922.17 1128.86,1926.82 1128.86,1948.86 ; v1(1180,2000) 1157.81,1977.81 1147.66,1977.81 1128.86,1959 1128.86,1948.86 ; v1(2106.3,1842.52) 2136.81,1842.52 2145.67,1833.66 U1.95@2145.67,1801.18
  Bottom Layer w5.91: v1(1180,2000) 1180,1925.91 1225.91,1880 2064.03,1880 2101.51,1842.52 v1(2106.3,1842.52)
SD_CD: J4.9 R37.2 U1.85 | length 1380.4
  Top Layer w5.91: U1.85@2342.52,1801.18 2343.76,1802.42 2343.76,1858.76 v1(2345,1860) ; R37.2@3062.99,1289.37 3062.99,1291.34 v1(3066.93,1295.28) ; v1(3255,1415) 3290.98,1415 J4.9@3298.23,1422.24
  Mid-Layer 2 w5.91: v1(2345,1860) 2345.91,1859.09 2345.91,1819.44 v1(2417.32,1748.03) ; v1(2937.01,1314.96) 3047.25,1314.96 v1(3066.93,1295.28)
  Bottom Layer w5.91: v1(2417.32,1748.03) 2755,1410.35 2841.61,1410.35 v1(2937.01,1314.96) ; v1(3066.93,1295.28) 3094.06,1322.4 3094.06,1389.72 3117.8,1413.46 3134.17,1413.46 3146.96,1400.67 3240.1,1400.67 3254.43,1415 v1(3255,1415)
SD_CLK: J4.5 R36.2 | length 328.9
  Top Layer w5.91: J4.5@3298.23,1589.57 3308.07,1589.57 3374.76,1522.87 3374.76,1421.81 3355.91,1402.96 3355.91,1392.1 3348.43,1384.62 R36.2@3348.43,1309.06
SD_CLK_MCU: R36.1 U1.80 | length 1197.4
  Top Layer w5.91: v1(2437.44,1857.29) 2439.19,1855.53 2439.19,1802.94 U1.80@2440.94,1801.18 ; v1(3153.29,1484.23) 3191.85,1445.67 3191.85,1423.87 3196.51,1419.21 3205.95,1419.21 3270.67,1354.5 3270.67,1323.82 R36.1@3285.43,1309.06
  Mid-Layer 2 w5.91: v1(2956.69,1653.54) 3003.52,1606.72 3013.71,1606.72 3069.36,1551.08 3069.36,1540.49 3125.61,1484.23 v1(3153.29,1484.23)
  Bottom Layer w5.91: v1(2437.44,1857.29) 2437.44,1829.89 2483.78,1783.54 2846.77,1783.54 2956.1,1674.21 2956.1,1654.14 v1(2956.69,1653.54)
SD_CMD: J4.3 R31.2 U1.83 | length 1967.4
  Top Layer w5.91: v1(2380,1755) 2380.95,1755.94 2380.95,1800.24 U1.83@2381.89,1801.18 ; v1(3169.8,1525) 3190.47,1525 3192.83,1522.64 3203.74,1522.64 R31.2@3218.5,1507.87 ; J4.3@3298.23,1676.18 3503.47,1676.18 v1(3524.87,1697.58)
  Mid-Layer 1 w5.91: v1(2380,1755) 2380,1665 2489.96,1555.04 2651.8,1555.04 2679.52,1582.76 2787.87,1582.76 2903.88,1698.76 2929.19,1698.76 2940.76,1687.19 2940.76,1665.57 2936.93,1661.73 2936.93,1609.93 3023.31,1523.54 3043.78,1523.54 3107.32,1460 3170,1460 3173.46,1463.46 3173.46,1490 3173.05,1490.41 3173.05,1521.75 v1(3169.8,1525)
  Mid-Layer 2 w5.91: v1(3169.8,1525) 3173.19,1528.39 3178.39,1528.39 3252.1,1602.1 3429.39,1602.1 v1(3524.87,1697.58)
SD_D0: J4.7 R32.2 U1.65 | length 1788.7
  Top Layer w5.91: U1.65@2588.58,1535.43 2701.18,1535.43 2707.47,1541.72 2707.47,1663.94 2710.93,1667.4 2810.52,1667.4 2861.86,1616.06 2950.71,1616.06 v1(3003.94,1669.29) ; v1(3090.55,1818.9) 3090.55,1858.27 R32.2@3092.52,1860.24 ; J4.7@3298.23,1502.95 3308.07,1502.95 3355,1456.02 v1(3355,1430)
  Mid-Layer 2 w5.91: v1(3003.94,1669.29) 3003.94,1671.26 3059.06,1726.38 v1(3059.06,1728.35) ; v1(3355,1430) 3491.61,1566.61 3506.61,1566.61 v1(3510,1570)
  Bottom Layer w5.91: v1(3059.06,1728.35) 3059.06,1787.4 v1(3090.55,1818.9) 3125.33,1818.9 3137.2,1830.76 3286.95,1830.76 3349.45,1768.27 3482.14,1768.27 3544.64,1705.77 3544.64,1604.64 v1(3510,1570)
SD_D1: J4.8 R33.2 U1.66 | length 1203.6
  Top Layer w5.91: U1.66@2588.58,1555.12 2621.48,1555.12 2625.65,1559.29 2625.65,1560.86 2635,1570.21 v1(2635,1575) ; v1(2866.14,1688.98) 2868.11,1688.98 R33.2@2883.86,1704.72 ; v1(2870,1540) 2870,1477.02 2905.99,1441.02 2994.58,1441.02 3055.6,1380 3078.1,1380 3107.86,1350.24 3149.45,1350.24 v1(3173.23,1374.02) ; J4.8@3298.23,1459.65 3308.23,1449.64 3331.78,1449.64 3335.24,1446.18 3335.24,1396.61 3331.78,1393.15 3306.54,1393.15 v1(3303.15,1389.76)
  Mid-Layer 2 w5.91: v1(2866.14,1688.98) 2868.07,1687.05 2868.07,1541.93 v1(2870,1540)
  Bottom Layer w5.91: v1(2635,1575) 2666.22,1606.22 2783.39,1606.22 v1(2866.14,1688.98) ; v1(3173.23,1374.02) 3177.74,1374.02 3193.49,1389.76 v1(3303.15,1389.76)
SD_D2: J4.1 R34.2 U1.78 | length 958.1
  Top Layer w5.91: U1.78@2480.32,1801.18 2480.32,1833.66 2492.05,1845.39 2492.05,1866.45 2527.17,1901.57 R34.2@2952.76,1901.57 2965.95,1914.76 3007.56,1914.76 3014.09,1908.23 3091.77,1908.23 3113.11,1886.89 3113.53,1886.89 3118.19,1882.23 3118.19,1881.81 v1(3236.22,1763.78) ; J4.1@3284.45,1762.8 J4.1@3298.23,1762.8
  Bottom Layer w5.91: v1(3236.22,1763.78) v1(3283.46,1763.78)
SD_D3: J4.2 R35.2 U1.79 | length 1017.7
  Top Layer w5.91: U1.79@2460.63,1801.18 2462.82,1803.37 2462.82,1862.82 v1(2465,1865) ; v1(2539.37,1834.65) 2845.47,1834.65 2873.03,1862.2 R35.2@2874.02,1862.2 2887.72,1875.9 2980.69,1875.9 2995,1890.22 v1(2995,1895) ; J4.2@3284.45,1719.49 J4.2@3298.23,1719.49
  Mid-Layer 2 w5.91: v1(2995,1895) 3070.79,1819.21 3070.79,1807.17 3157.56,1720.39 3283.39,1720.39 v1(3283.46,1720.47)
  Bottom Layer w5.91: v1(2465,1865) 2495.35,1834.65 v1(2539.37,1834.65)
SD_PWR_EN_N: Q5.1 R30.2 U1.86 | length 877.1
  Top Layer w5.91: U1.86@2322.83,1801.18 2325.79,1798.23 2325.79,1777.14 2402.93,1700 2457.05,1700 2517.69,1760.64 2617.71,1760.64 2642.04,1736.3 2771.99,1736.3 2808.29,1700 2818.5,1700 2823.22,1704.72 2823.22,1713.98 2834.79,1725.56 2844.06,1725.56 2857.67,1739.17 2947.83,1739.17 R30.2@2962.6,1753.94 2977.36,1739.17 2999.01,1739.17 3033.46,1704.72 Q5.1@3033.46,1690.94
SD_VDD: C32.1 C33.1 J4.4 Q5.3 R31.1 R32.1 R33.1 R34.1 R35.1 | length 1573.7
  Top Layer w5.91: v1(2842.98,1705.79) 2842.98,1681.63 2882.87,1641.73 R33.1@2883.86,1641.73 ; v1(2846.46,1755.91) 2846.46,1760.7 2858.27,1772.51 2858.27,1784.45 2873.03,1799.21 R35.1@2874.02,1799.21 2875,1799.21 2914.37,1838.58 R34.1@2952.76,1838.58 2967.52,1853.35 2988.19,1853.35 2995.08,1860.24 R32.1@3029.53,1860.24 3029.53,1859.25 3070.79,1817.99 3070.79,1808.15 3070.87,1808.07 Q5.3@3070.87,1773.62 3070.87,1759.84 3079.72,1750.98 3099.8,1750.98 3164.37,1686.42 3164.37,1682.09 3181.1,1665.35 C32.1@3185.04,1665.35 ; v1(3169.29,1594.49) 3167.32,1594.49 C33.1@3157.48,1584.65 3157.48,1583.66 3134.65,1560.83 3134.65,1531.12 3173.05,1492.72 3173.05,1489.35 3217.52,1444.88 3219.49,1444.88 3234.25,1430.12 3234.25,1407.8 3265.78,1376.27 3265.88,1376.27 3311.1,1331.05 3311.1,1298.71 3327.42,1282.4 3369.44,1282.4 3376.03,1289 3376.03,1407.66 3385.67,1417.3 3385.67,1555.28 3308.07,1632.87 J4.4@3298.23,1632.87 ; v1(3169.29,1649.61) C32.1@3185.04,1665.35 ; C32.1@3188.98,1665.35 C32.1@3185.04,1665.35
  Bottom Layer w5.91: v1(2842.98,1705.79) 2843.5,1706.31 2843.5,1726.46 2846.46,1729.41 v1(2846.46,1755.91) ; v1(3169.29,1594.49) v1(3169.29,1649.61)
SWCLK: J7.4 U1.76 | length 963.4
  Top Layer w5.91: J7.4@1821.65,2140.35 1848.21,2166.91 1848.21,2200.07 1880.94,2232.8 2137.28,2232.8 v1(2480.32,1889.76) ; v1(2511.81,1858.27) 2511.81,1853.47 2519.61,1845.68 2519.61,1801.26 U1.76@2519.69,1801.18
  Bottom Layer w5.91: v1(2480.32,1889.76) v1(2511.81,1858.27)
SWDIO: J7.2 U1.72 | length 1372.6
  Top Layer w5.91: J7.2@1721.65,2140.35 1721.65,1778.35 1740.7,1759.3 1831.26,1759.3 v1(1834.65,1755.91) ; v1(2055.24,1670) 2055.24,1646.81 2076.81,1625.24 2128.63,1625.24 2137.48,1634.09 2456.6,1634.09 2495.74,1673.23 U1.72@2588.58,1673.23
  Bottom Layer w5.91: v1(1834.65,1755.91) 2042.45,1755.91 2060,1738.36 2060,1708.96 2055.24,1704.19 v1(2055.24,1670)
SWO: J7.6 U1.89 | length 657.3
  Top Layer w5.91: J7.6@1871.65,2190.35 1873.03,2190.35 1910.59,2152.8 2011.01,2152.8 2123.11,2040.7 2123.11,2020.17 2158.63,1984.65 2181.09,1984.65 2216.61,1949.13 2216.61,1930.6 2232.43,1914.78 2264.77,1914.78 2280.59,1898.96 2280.59,1856.94 2263.78,1840.13 U1.89@2263.78,1801.18
USB_CC1: J3.A5 R26.1 | length 85.7
  Top Layer w5.91: R26.1@3582.68,785.43 3583.66,785.43 3615.16,816.93 J3.A5@3655.32,816.93
USB_CC2: J3.B5 R27.1 | length 313.7
  Top Layer w5.91: v1(3575,930) 3577.52,932.52 3652.8,932.52 J3.B5@3655.32,935.04 ; v1(3605,1045) 3608.39,1048.39 3608.39,1060.16 3659.45,1111.22 R27.1@3659.45,1112.2
  Bottom Layer w5.91: v1(3575,930) 3622.05,977.05 3622.05,1026.04 3605,1043.09 v1(3605,1045)
USB_DM: J3.A7 J3.B7 U1.70 U13.2 | length 1925.3
  Top Layer w5.91: v1(2547.24,1311.02) 2547.24,1613.61 2561.67,1628.03 2565.04,1628.03 2570.87,1633.86 U1.70@2588.58,1633.86 ; v1(3346.46,795.35) 3346.53,795.28 3493.11,795.28 3509.84,812.01 3509.84,833.66 3552.17,875.98 3615,875.98 ; J3.B7@3655.32,836.61 3638.58,836.61 3632.76,842.44 3629.38,842.44 3624.73,847.1 3624.73,866.26 3615,875.98 ; J3.A7@3655.32,875.98 3615,875.98
  Mid-Layer 2 w5.91: v1(2547.24,1311.02) 2570.31,1334.09 2686.54,1334.09 2690,1330.64 2690,1245 v1(2670,1225)
  Bottom Layer w5.91: v1(2670,1225) 2670,1177.13 2761.34,1085.79 3055.94,1085.79 3346.38,795.35 v1(3346.46,795.35)
USB_DP: J3.A6 J3.B6 U1.71 U13.1 | length 1937.4
  Top Layer w5.91: v1(2485,1340) 2485,1571.05 2561.67,1647.72 2565.04,1647.72 2570.87,1653.54 U1.71@2588.58,1653.54 ; v1(3415,830) 3455,830 3463.58,838.58 3487.77,838.58 3544.86,895.67 J3.B6@3655.32,895.67 3672.05,895.67 3677.88,889.84 3681.25,889.84 3685.91,885.18 3685.91,866.78 3678.37,859.25 3658.27,859.25 J3.A6@3655.32,856.3
  Mid-Layer 2 w5.91: v1(2485,1340) 2566.62,1258.38 2566.62,1213.19 2598.73,1181.08 v1(2603,1181.08)
  Bottom Layer w5.91: v1(2603,1181.08) 2606.32,1181.08 2712.52,1074.88 2962.07,1074.88 3261.36,775.59 3360.59,775.59 v1(3415,830)
V1_IN: D1.2 J1.9 | length 457.5
  Top Layer w19.68: J1.9@1108.46,314.96 1116.71,314.96 1252.75,450.99 1258.08,450.99 1385.83,578.74 D1.2@1385.83,649.61
V2_IN: D2.2 J2.9 | length 457.5
  Top Layer w19.68: J2.9@2604.53,314.96 2612.78,314.96 2748.81,450.99 2754.14,450.99 2881.89,578.74 D2.2@2881.89,649.61
VBACKUP: BT2.1 U10.6 | length 1654.6
  Top Layer w5.91: BT2.1@437.01,2283.46 440.94,2283.46 676.41,2048 v1(1000.24,2048) ; v1(1125,2048) 1125,2201.77 ; U10.6@1206.69,1872.05 1216.53,1881.89 1232.67,1881.89 1259.35,1908.57 1259.35,1913.46 1252.87,1919.93 1252.87,1961.95 1257.53,1966.61 1306.54,1966.61 1310,1970.07 1310,2016.35 1183.98,2142.38 1183.98,2142.8 1125,2201.77 ; BT2.1@1062.99,2283.46 BT2.1@1059.06,2283.46 BT2.1@1062.99,2283.46 ; BT2.1@1062.99,2283.46 BT2.1@1125,2221.46 ; BT2.1@1062.99,2283.46 BT2.1@1125,2221.46 ; 1125,2201.77 BT2.1@1125,2221.46 ; 1125,2201.77 BT2.1@1125,2221.46
  Mid-Layer 1 w5.91: v1(1000.24,2048) v1(1125,2048)
VBAT: C9.1 Q1.3 R16.2 U5.8 U7.12 | length 1790.7
  Top Layer w19.68: v1@2734.25,976.38 2777.56,1019.69 Q1.3@2777.56,1082.68 2777.56,1116.14 2831.69,1170.28 2915.28,1170.28 v1(2945,1200) ; 2735,925 v1(2735,975) ; v1(3037.38,1555.1) 3068.9,1586.61 R16.2@3068.9,1594.49 ; U7.12@3220,2120 3233.8,2133.8 3233.8,2143.8 v1(3234.56,2144.56)
  Mid-Layer 2 w19.68: v1(2679.13,787.4) 2731.38,839.65 2731.38,971.38 v1(2735,975)
  Bottom Layer w19.68: v1(2945,1200) 2991.22,1246.22 2991.22,1503.03 3004.15,1515.96 3004.15,1521.86 v1(3037.38,1555.1) ; v1@3035.57,1555.1 3037.38,1556.92 3037.38,1682.48 3031.5,1688.37 3031.5,1814.69 3255,2038.19 3255,2080.62 3234.56,2101.06 v1(3234.56,2144.56)
VBUS: D5.2 J3.A4 J3.A9 R28.1 | length 628.3
  Top Layer w19.68: D5.2@3464.57,1238.19 3478.35,1224.41 3478.35,1213.58 3571.85,1120.08 R28.1@3572.83,1120.08 3572.83,1019.17 3629.4,962.6 3653.35,962.6 3657.28,958.66 3668.11,958.66 3670.98,955.79 3684.1,955.79 3692.8,947.09 3692.8,903.46 3703.7,892.55 3703.7,859.41 3692.8,848.51 3692.8,785.19 3684.1,776.5 3682.69,776.5 3679.81,773.62 3657.28,773.62 J3.A4@3655.32,771.65
VBUS_DET: R28.2 R29.1 U1.68 | length 1364.9
  Top Layer w5.91: U1.68@2588.58,1594.49 2618.28,1594.49 2630,1606.21 v1(2630,1640) ; v1(3395.8,1399.48) 3535.43,1259.84 R29.1@3570.87,1259.84 3572.83,1257.87 R28.2@3572.83,1183.07
  Mid-Layer 2 w5.91: v1(2964.57,1421.26) 2969.08,1421.26 2984.83,1405.51 v1(3066.93,1405.51)
  Bottom Layer w5.91: v1(2630,1640) 2630,1597.95 2615.24,1583.19 2615.24,1566.81 2760.79,1421.26 v1(2964.57,1421.26) ; v1(3066.93,1405.51) 3121.42,1460 3162.22,1460 3183.32,1438.9 3318.15,1438.9 3357.57,1399.48 v1(3395.8,1399.48)
VCAP1: C19.1 U1.48 | length 429.4
  Top Layer w5.91: C19.1@2352.36,1051.18 2353.35,1051.18 2387.71,1085.55 2519.01,1085.55 2547.17,1113.7 2547.17,1157.79 2563.07,1173.7 2563.07,1197.16 2537.72,1222.52 2490.8,1222.52 2483.27,1214.99 2483.27,1193.9 U1.48@2480.32,1190.94
VCAP2: C20.1 U1.98 | length 463.7
  Top Layer w5.91: U1.98@2086.61,1801.18 2086.61,1783.47 2080.79,1777.64 2080.79,1774.27 2076.13,1769.61 2038.04,1769.61 2009.76,1797.89 2009.76,1901.92 2014.42,1906.58 2014.42,1942.37 2031.81,1959.76 2048.19,1959.76 2069.8,1938.15 2069.8,1935.68 2096.11,1909.37 2142.79,1909.37 2174.21,1877.95 C20.1@2175.2,1877.95
VCHG: C8.1 D4.1 D5.1 D6.2 Q1.1 R15.1 U5.1 | length 2000.9
  Top Layer w19.68: D6.2@2578.74,1120.08 2653.54,1120.08 ; C8.1@2588.58,848.43 2580.71,848.43 2546.18,882.95 2546.18,949.06 2554.88,957.76 2642.01,957.76 2653.54,969.29 ; 2660,925 2653.54,931.46 2653.54,969.29 ; R15.1@2736.22,1188.98 R15.1@2735.24,1188.98 ; D5.1@3464.57,1124.02 3450.79,1137.8 3450.79,1139.1 3340.79,1249.1 3287.99,1249.1 3233.35,1303.74 3233.35,1366.65 3198.58,1401.42 3189.14,1401.42 3174.06,1416.5 3174.06,1425.94 3136.34,1463.66 3034.05,1463.66 3016.65,1481.06 3016.65,1532.27 3005.12,1543.8 2931.32,1543.8 2908.47,1566.65 2848.15,1566.65 2702.68,1421.18 2702.68,1362.82 2734.44,1331.05 2734.44,1299.28 2719.69,1284.53 2711.37,1284.53 2702.68,1275.83 2702.68,1221.54 R15.1@2735.24,1188.98 ; 2653.54,969.29 2653.54,1120.08 ; 2653.54,1120.08 2705.71,1120.08 2707.68,1122.05 2707.68,1161.42 R15.1@2735.24,1188.98
VEH_PG: R7.2 U1.41 U4.6 | length 1388.4
  Top Layer w5.91: U1.41@2342.52,1190.94 v1(2342.52,1224.41) ; v1(3129.92,700.79) 3236.22,700.79 ; U4.6@3275.59,762.4 3256.89,762.4 3237.13,742.64 3237.13,701.69 3236.22,700.79 ; R7.2@3356.3,750 3355.32,750 3324.97,719.66 3324.97,708.22 3309.4,692.64 3241.78,692.64 3237.13,697.3 3237.13,699.88 3236.22,700.79
  Mid-Layer 2 w5.91: v1(2342.52,1224.41) 2370.08,1224.41 v1(2539.37,1055.12)
  Bottom Layer w5.91: v1(2539.37,1055.12) 2590.16,1055.12 2747.56,897.72 2932.99,897.72 v1(3129.92,700.79)
VIN_P: C1.1 C2.1 D1.1 D2.1 D3.1 R1.1 R8.1 U4.2 | length 2633.6
  Top Layer w19.68: D1.1@1212.6,649.61 1212.6,663.39 1230.31,681.1 1327.43,681.1 1352.12,705.79 1697.3,705.79 1760.45,642.64 2517.32,642.64 2526.71,652.03 2537.85,652.03 2547.24,661.42 ; R8.1@2537.4,767.72 2537.4,667.32 2554.21,650.51 2684.14,650.51 D2.1@2685.04,649.61 ; R1.1@2685.04,551.18 D2.1@2685.04,649.61 ; C1.1@2963.58,610.24 2963.58,750.98 D3.1@2933.07,781.5 ; 2964.57,681.1 3106.62,681.1 3113.59,674.13 3126.06,674.13 3160.43,639.76 C2.1@3160.43,610.24 ; U4.2@3062.99,812.4 2963.98,812.4 D3.1@2933.07,781.5 ; D2.1@2685.04,649.61 D2.1@2708.66,649.61 2708.66,663.39 2779.37,734.09 2802.99,734.09 2850.39,781.5 D3.1@2933.07,781.5
VIN_SENSE: C7.1 R8.2 R9.1 U1.15 | length 1276.8
  Top Layer w5.91: U1.15@1978.35,1456.69 1996.06,1456.69 2001.89,1450.87 2005.26,1450.87 2019.76,1436.36 2019.76,1260.49 2009.76,1250.49 2009.76,1090.21 2076.35,1023.62 v1(2078.74,1023.62) ; v1(2204.72,897.64) 2205.71,896.65 2205.71,854.29 2267.2,792.8 2348.94,792.8 2433.07,708.66 ; C7.1@2399.61,679.13 2399.61,680.12 2422.72,703.23 2423.71,703.23 2444.88,724.41 2444.88,741.14 2459.65,755.91 2461.61,755.91 2500.08,794.37 2574.72,794.37 2600.39,768.7 R8.2@2600.39,767.72
  Bottom Layer w5.91: v1(2078.74,1023.62) v1(2204.72,897.64)
VSYS: C10.1 C13.1 C16.1 D6.1 L3.1 Q1.2 U8.1 U8.10 U9.4 U9.6 | length 2613.6
  Top Layer w19.68: C16.1@1342.52,1570.87 v1(1362.2,1551.18) ; C16.1@1348.43,1576.77 1291.02,1576.77 1226.3,1512.05 1226.3,1361.96 1308.73,1279.53 C13.1@1458.66,1279.53 ; v1(1393.7,1519.69) 1394.45,1518.93 1401.34,1518.93 U8.1@1419.29,1500.99 ; U8.1@1423.23,1496.14 U8.10@1478.35,1496.14 ; U9.4@1495.08,1155.51 1506.89,1143.7 1651.57,1143.7 1678.99,1171.12 1678.99,1175.06 1692.91,1188.98 1692.91,1241.46 1556.42,1377.95 1555.12,1377.95 ; U9.6@1495.08,1206.69 1495.08,1235.24 1458.66,1271.65 C13.1@1458.66,1279.53 ; C10.1@1584.65,1437.99 1569.88,1437.99 1556.1,1424.21 1556.1,1376.97 1548.23,1376.97 1458.66,1287.4 C13.1@1458.66,1279.53 ; 1692.91,1192.91 1888.86,996.97 2569.8,996.97 2619.32,1046.49 2625.23,1046.49 v1(2625.98,1047.24) ; v1(2681.1,1047.24) 2692.91,1047.24 Q1.2@2694.88,1045.28
  Bottom Layer w19.68: v1(1362.2,1551.18) v1(1393.7,1519.69) ; v1(2625.98,1047.24) v1(2681.1,1047.24)
pads on no net: BT1. J1.1 J1.4 J1.8 J2.1 J2.4 J2.8 J3. J3.A8 J3.B8 J7. J7.7 J7.8 U1.1 U1.2 U1.3 U1.4 U1.5 U1.7 U1.8 U1.9 U1.17 U1.18 U1.24 U1.25 U1.26 U1.33 U1.34 U1.35 U1.36 U1.45 U1.46 U1.47 U1.54 U1.55 U1.56 U1.57 U1.58 U1.59 U1.60 U1.61 U1.62 U1.63 U1.64 U1.67 U1.69 U1.77 U1.87 U1.88 U1.90 U1.91 U6.1 U8.5

## Polygon pours and split planes (outlines as drawn)
GND on Bottom Layer "GND_Bottom" (solid, remove dead copper, pour order 3): 259.84,15.75 3677.17,15.75 3677.17,157.48 3679.13,177.44 3684.96,196.65 3694.41,214.33 3707.17,229.84 3722.68,242.6 3740.35,252.05 3759.57,257.87 3779.53,259.84 3921.26,259.84 3921.26,2338.58 3779.53,2338.58 3759.57,2340.55 3740.35,2346.38 3722.68,2355.83 3707.17,2368.58 3694.41,2384.09 3684.96,2401.77 3679.13,2420.98 3677.17,2440.94 3677.17,2582.68 259.84,2582.68 259.84,2440.94 257.87,2420.98 252.05,2401.77 242.6,2384.09 229.84,2368.58 214.33,2355.83 196.65,2346.38 177.44,2340.55 157.48,2338.58 15.75,2338.58 15.75,259.84 157.48,259.84 177.44,257.87 196.65,252.05 214.33,242.6 229.84,229.84 242.6,214.33 252.05,196.65 257.87,177.44 259.84,157.48
GND on Top Layer "GND_Top" (solid, remove dead copper, pour order 2): 259.84,15.75 3677.17,15.75 3677.17,157.48 3679.13,177.44 3684.96,196.65 3694.41,214.33 3707.17,229.84 3722.68,242.6 3740.35,252.05 3759.57,257.87 3779.53,259.84 3921.26,259.84 3921.26,2338.58 3779.53,2338.58 3759.57,2340.55 3740.35,2346.38 3722.68,2355.83 3707.17,2368.58 3694.41,2384.09 3684.96,2401.77 3679.13,2420.98 3677.17,2440.94 3677.17,2582.68 259.84,2582.68 259.84,2440.94 257.87,2420.98 252.05,2401.77 242.6,2384.09 229.84,2368.58 214.33,2355.83 196.65,2346.38 177.44,2340.55 157.48,2338.58 15.75,2338.58 15.75,259.84 157.48,259.84 177.44,257.87 196.65,252.05 214.33,242.6 229.84,229.84 242.6,214.33 252.05,196.65 257.87,177.44 259.84,157.48
3V3 on Mid-Layer 2 "3V3_Plane_L3" (solid, remove dead copper, pour order 1): 259.84,15.75 3677.17,15.75 3677.17,157.48 3679.13,177.44 3684.96,196.65 3694.41,214.33 3707.17,229.84 3722.68,242.6 3740.35,252.05 3759.57,257.87 3779.53,259.84 3921.26,259.84 3921.26,2338.58 3779.53,2338.58 3759.57,2340.55 3740.35,2346.38 3722.68,2355.83 3707.17,2368.58 3694.41,2384.09 3684.96,2401.77 3679.13,2420.98 3677.17,2440.94 3677.17,2582.68 259.84,2582.68 259.84,2440.94 257.87,2420.98 252.05,2401.77 242.6,2384.09 229.84,2368.58 214.33,2355.83 196.65,2346.38 177.44,2340.55 157.48,2338.58 15.75,2338.58 15.75,259.84 157.48,259.84 177.44,257.87 196.65,252.05 214.33,242.6 229.84,229.84 242.6,214.33 252.05,196.65 257.87,177.44 259.84,157.48
GND on Mid-Layer 1 "GND_Plane_L2" (solid, remove dead copper, pour order 0): 259.84,15.75 3677.17,15.75 3677.17,157.48 3679.13,177.44 3684.96,196.65 3694.41,214.33 3707.17,229.84 3722.68,242.6 3740.35,252.05 3759.57,257.87 3779.53,259.84 3921.26,259.84 3921.26,2338.58 3779.53,2338.58 3759.57,2340.55 3740.35,2346.38 3722.68,2355.83 3707.17,2368.58 3694.41,2384.09 3684.96,2401.77 3679.13,2420.98 3677.17,2440.94 3677.17,2582.68 259.84,2582.68 259.84,2440.94 257.87,2420.98 252.05,2401.77 242.6,2384.09 229.84,2368.58 214.33,2355.83 196.65,2346.38 177.44,2340.55 157.48,2338.58 15.75,2338.58 15.75,259.84 157.48,259.84 177.44,257.87 196.65,252.05 214.33,242.6 229.84,229.84 242.6,214.33 252.05,196.65 257.87,177.44 259.84,157.48

## Silkscreen, mask and mechanical layers (free items; w line width, h text height)
Mechanical 1:
  the board outline again, w3.94